# Altium PCB H bridge circuit - routed.PcbDoc
Units mm, origin at the board's own origin, x right, y up, seen from the top; angles counter-clockwise.
Board outline 46.04 x 31.11 mm, 2 copper layers (Top Layer, Bottom Layer); 34 components, 30 nets, 89 pads, 17 vias.
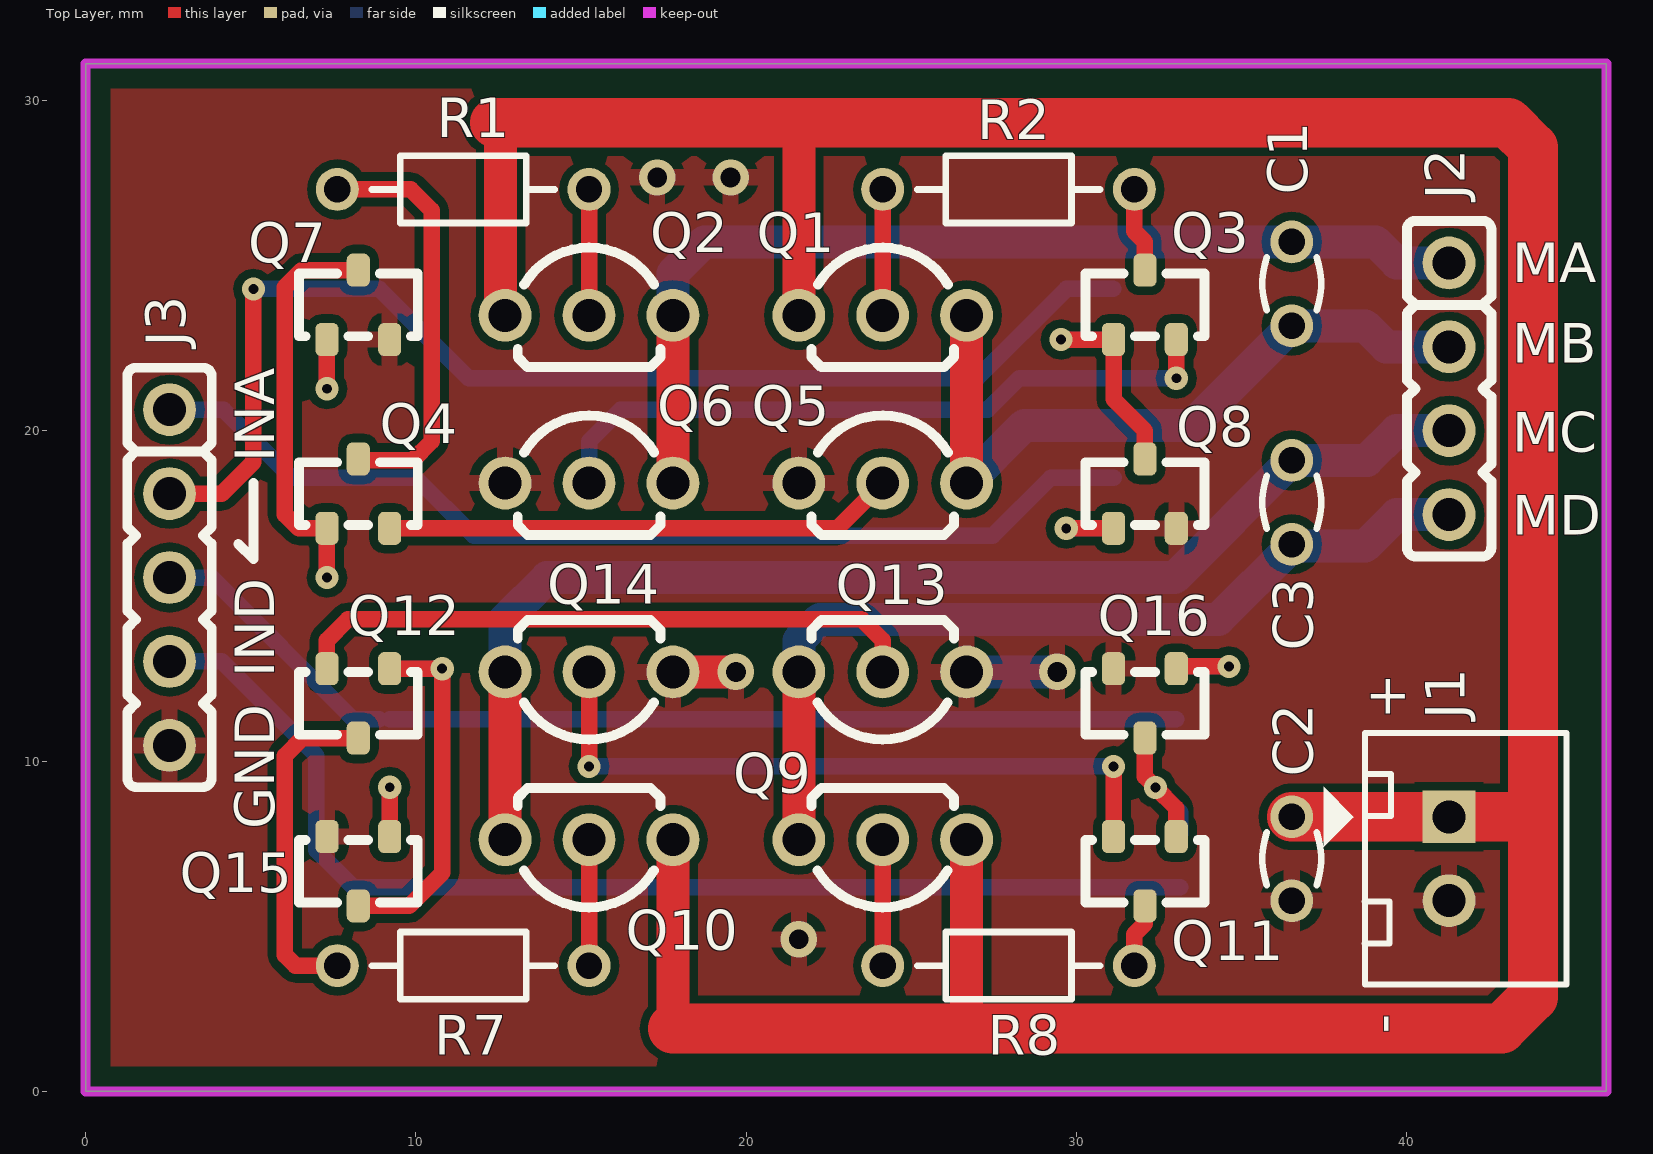
[diagram p0: Top Layer view]
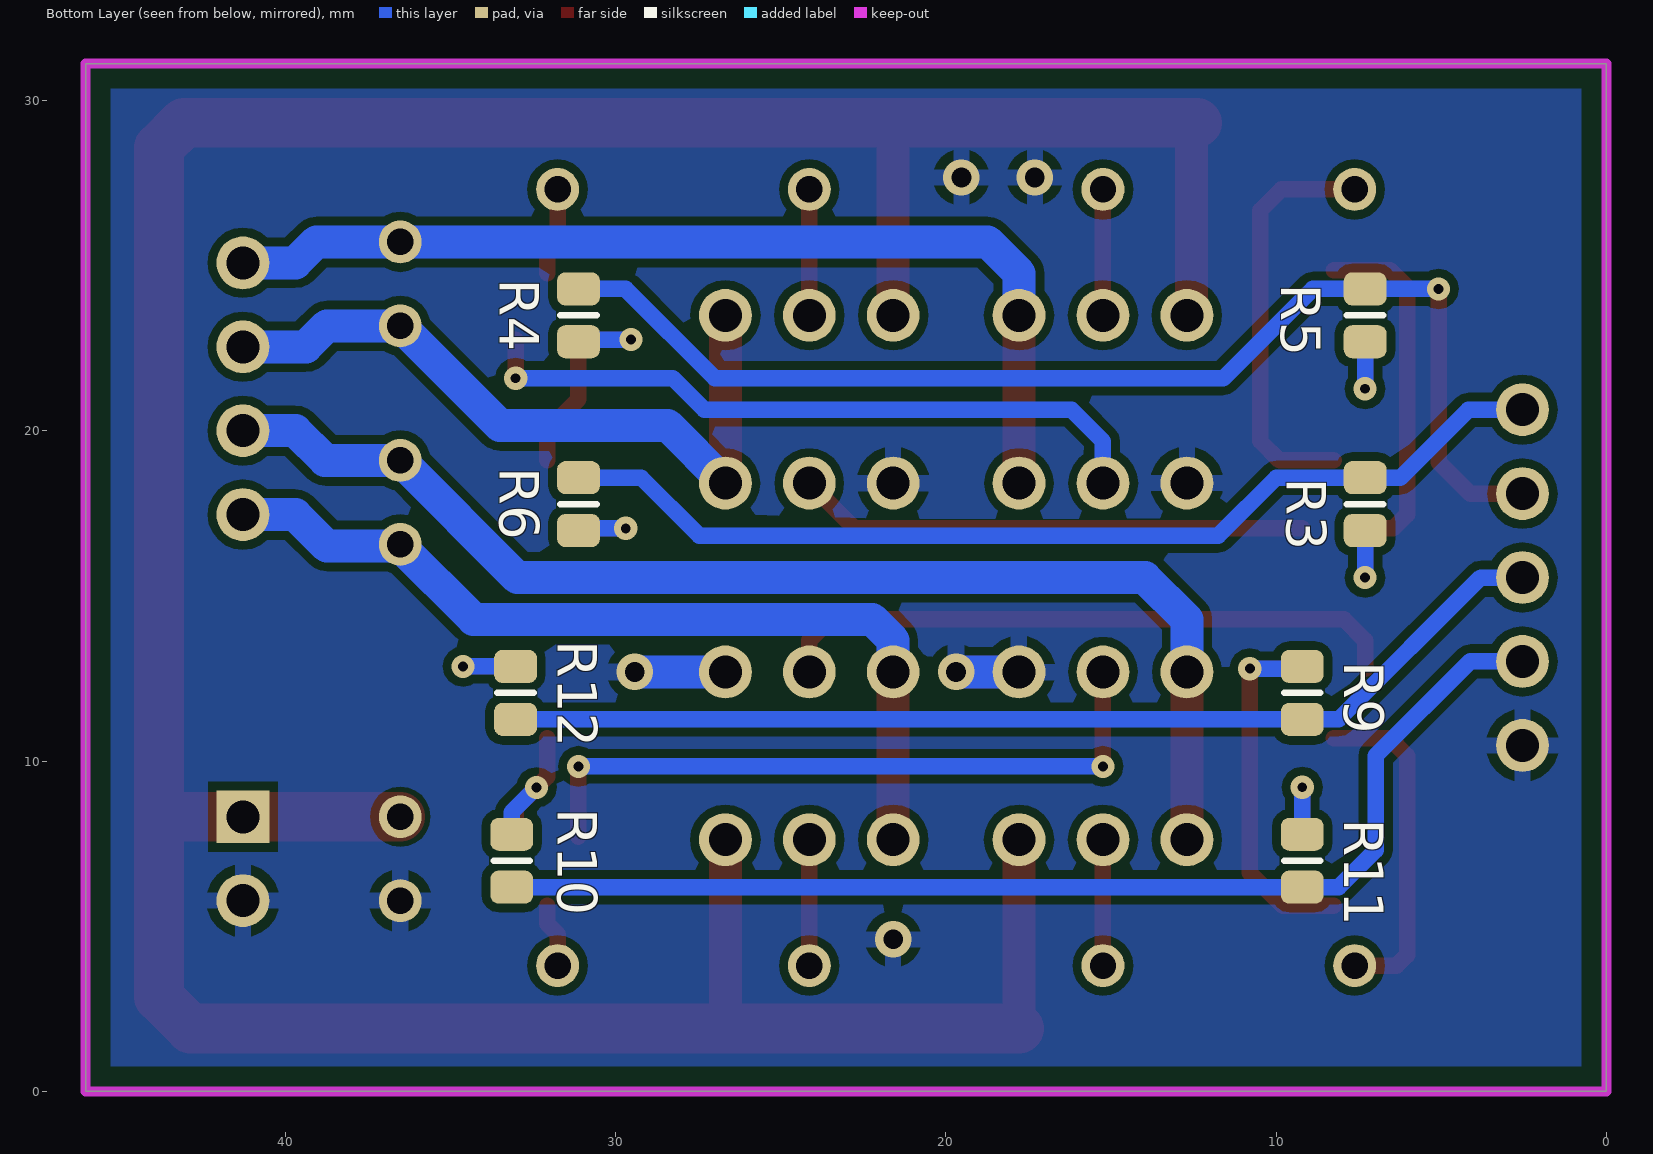
[diagram p1: Bottom Layer view, seen from below]
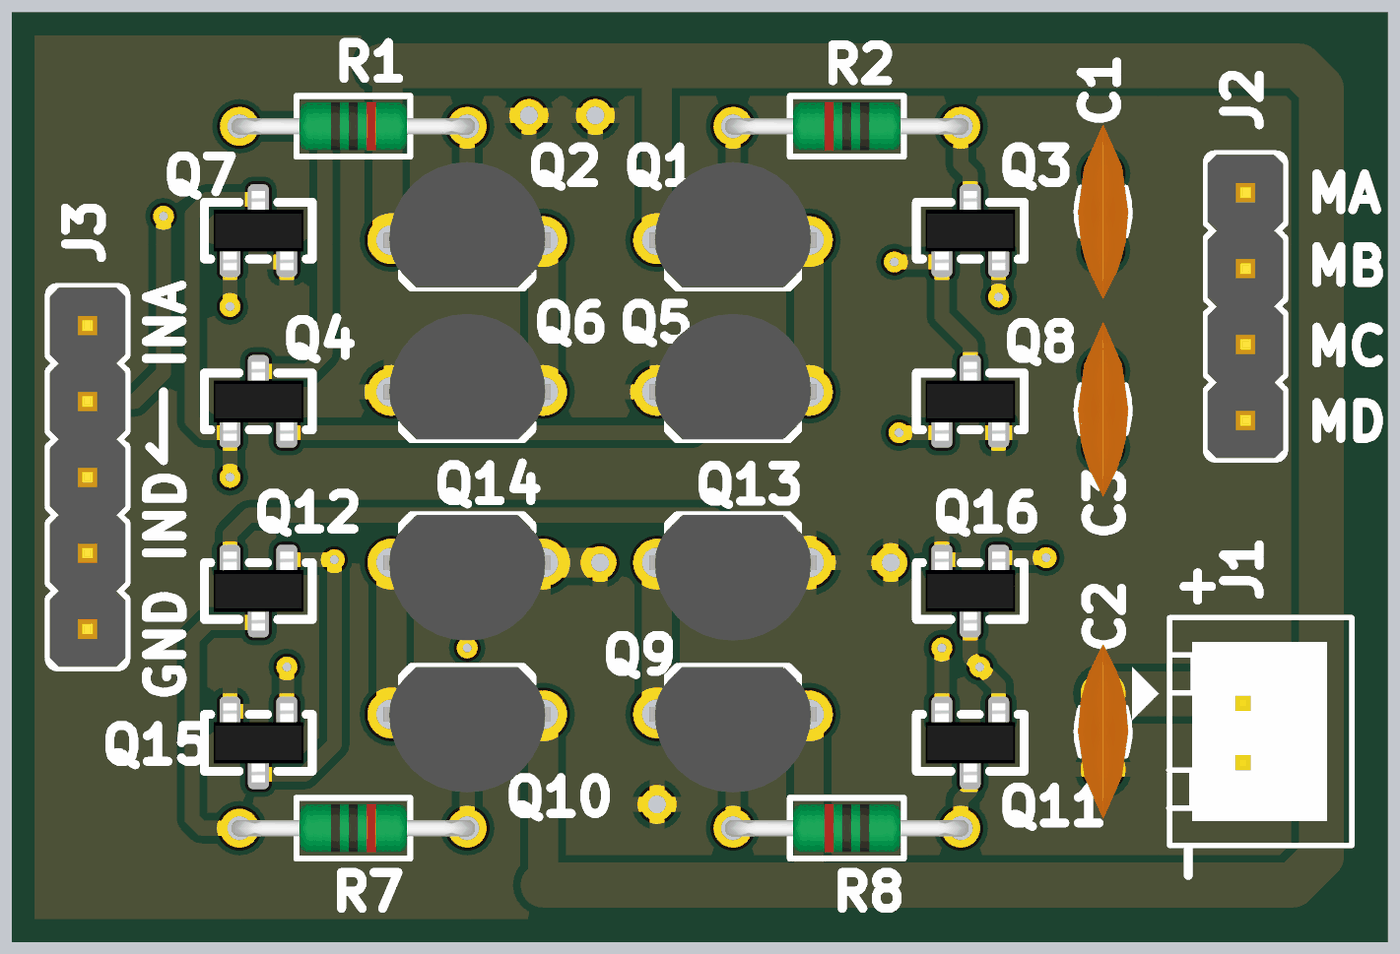
[diagram p2: 3D render of the assembled board from above, using the file's embedded part models]
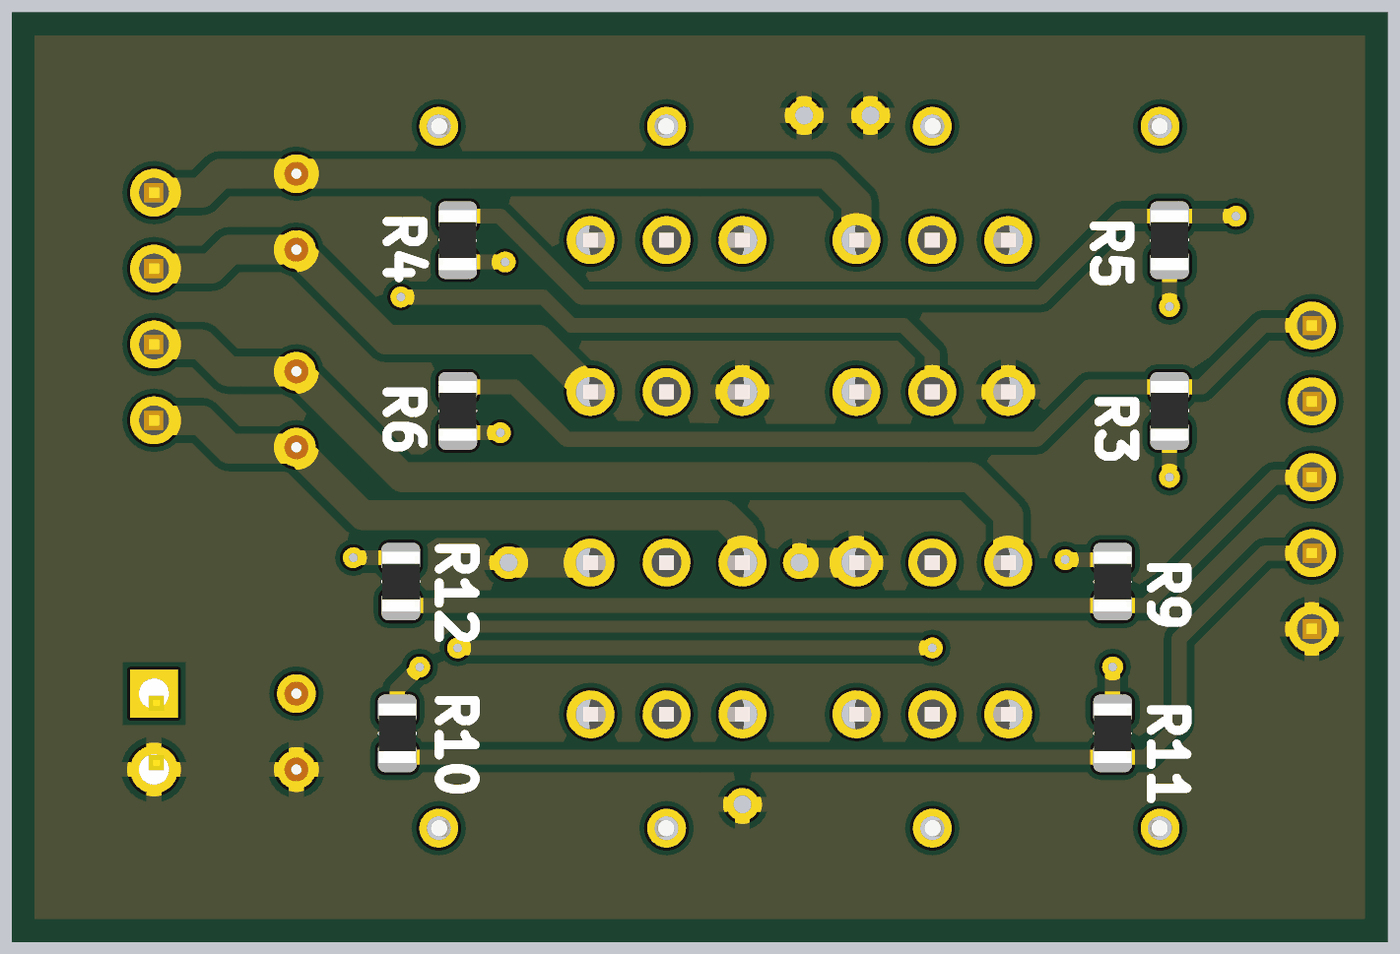
[diagram p3: 3D render of the assembled board from below, using the file's embedded part models]

## Layer stack, top to bottom
Top Solder: solder mask 0.0102, Solder Resist, Dk 3.5
Top Layer: signal copper 0.0356
Dielectric1: dielectric 0.32, FR-4, Dk 4.8
Bottom Layer: signal copper 0.0356
Bottom Solder: solder mask 0.0102, Solder Resist, Dk 3.5

## Board outline
0,0 46.038,0 46.038,31.115 0,31.115

## Design rules (kind name [scope] priority, off if disabled: settings)
Clearance [All] p1: gap=0.254 ignorepadtopadclearanceinfootprint=FALSE except(0: Arc-Hole Track-Hole SMDPad-Hole THPad-Hole Via-Hole Fill-Hole Poly-Hole Region-Hole Text-Hole)
PlaneConnect [All] p1: planeconnectstyle=Relief reliefexpansion=0.508 reliefentries=4 reliefconductorwidth=0.5 reliefairgap=0.254
PolygonConnect [All] p1: connectstyle=Relief reliefconductorwidth=0.5 reliefentries=4 polygonreliefangle="90 Angle" airgapwidth=0.3
RoutingVias [All] p1: holewidth=0.3 width=0.7 viastyle="Through Hole" minholewidth=0.3 minwidth=0.7 maxholewidth=0.6 maxwidth=1.1
SolderMaskExpansion [All] p1: expansion=0.102 istentingtop=FALSE
Width [All] p1: maxlimit=2 minlimit=0.5 preferedwidth=0.5
29 further rules are at their usual default settings.

## Components (designator, comment, footprint, x,y, rotation, side; value= is the part's Value field where it differs from the comment)
C1 "5WF104MABAA" C0_1uF 36.512,24.447 r270 top
C2 "5WF104MABAA" C0_1uF 36.512,7.045 r90 top
C3 "5WF104MABAA" C0_1uF 36.512,17.831 r270 top
J1 "OSTTC-02-2162" CON2 41.275,8.315 r270 top
J2 "2012-254-1x04-SG" Header_4 41.275,21.273 r270 top
J3 "2012-254-1x05-SG" Header_5 2.54,15.557 r270 top
Q1 "SS8550" SS8550 24.13,23.495 r0 top
Q2 "SS8550" SS8550 15.24,23.495 r0 top
Q3 "2SC1815-HF" 2SC1815-HF 32.067,23.812 r0 top
Q4 "2SC1815-HF" 2SC1815-HF 8.255,18.098 r0 top
Q5 "SS8050" SS8050 24.13,18.415 r0 top
Q6 "SS8050" SS8050 15.24,18.415 r0 top
Q7 "2SC1815-HF" 2SC1815-HF 8.255,23.812 r0 top
Q8 "2SC1815-HF" 2SC1815-HF 32.067,18.098 r0 top
Q9 "SS8550" SS8550 24.13,7.62 r180 top
Q10 "SS8550" SS8550 15.24,7.62 r180 top
Q11 "2SC1815-HF" 2SC1815-HF 32.067,6.667 r180 top
Q12 "2SC1815-HF" 2SC1815-HF 8.255,11.747 r180 top
Q13 "SS8050" SS8050 24.13,12.7 r180 top
Q14 "SS8050" SS8050 15.24,12.7 r180 top
Q15 "2SC1815-HF" 2SC1815-HF 8.255,6.667 r180 top
Q16 "2SC1815-HF" 2SC1815-HF 32.067,11.747 r180 top
R1 "CF1/4W220RJ25" "Res AXIAL-0.3" 11.43,27.305 r0 top
R2 "CF1/4W220RJ25" "Res AXIAL-0.3" 27.94,27.305 r180 top
R3 "CR05JL7-2K2" RESC2012L 7.302,17.78 r270 bottom
R4 "CR05JL7-2K2" RESC2012L 31.117,23.495 r90 bottom
R5 "CR05JL7-2K2" RESC2012L 7.302,23.495 r270 bottom
R6 "CR05JL7-2K2" RESC2012L 31.115,17.78 r90 bottom
R7 "CF1/4W220RJ25" "Res AXIAL-0.3" 11.43,3.81 r0 top
R8 "CF1/4W220RJ25" "Res AXIAL-0.3" 27.94,3.81 r180 top
R9 "CR05JL7-2K2" RESC2012L 9.207,12.065 r90 bottom
R10 "CR05JL7-2K2" RESC2012L 33.138,6.985 r270 bottom
R11 "CR05JL7-2K2" RESC2012L 9.207,6.985 r90 bottom
R12 "CR05JL7-2K2" RESC2012L 33.02,12.065 r270 bottom

## Footprints (in the part's own frame and the unit in brackets; to place one, negate y for a bottom-side part, rotate by r counter-clockwise, add the part's x,y. Pads: shape width x height; smd on the part's side, far side on the other; paste and mask are expansions set on the pad)
2SC1815-HF [mm] "SOT23-3"
  rrect50% 0.7x1 smd: 1(-0.95,-1.05) 2(0.95,-1.05) 3(0,1.05)
  silkscreen extent -1.8,-0.95 1.8,0.95, body extent -1.5,-1.32 1.5,1.32, height 1.08
C0_1uF [mm] "Tu gom 3.5wf104mabaa 05 x 1.78 x 3.43 mm (WxTxH max); Pin Spacing 2.54 mm (typ)"
  round 1.3 hole 0.8: 1(-1.27,0) 2(1.27,0)
  silkscreen extent -0.8,-0.89 0.8,0.89, body extent -2.92,-0.85 2.92,0.85, height 6.42
CON2 [mm] "CON2"
  rect 1.6x1.6 hole 1 mask+0.1: 1(0,0)
  round 1.6 hole 1 mask+0.1: 2(2.54,0)
  silkscreen extent -2.54,-3.8 5.08,3.56, body extent -1.73,-1.78 4.27,2.72, height 6
Header_4 [mm] "Connector DIP, 4Pin_2.54mm"
  round 1.6 hole 1 mask+0.1: 1(-3.81,0) 2(-1.27,0) 3(1.27,0) 4(3.81,0)
  silkscreen extent -5.08,-1.28 5.08,1.28, body extent -5.08,-1.27 5.08,1.27, height 10.1
Header_5 [mm] "Connector DIP, 5Pin_2.54mm"
  round 1.6 hole 1 mask+0.1: 1(-5.08,0) 2(-2.54,0) 3(0,0) 4(2.54,0) 5(5.08,0)
  silkscreen extent -6.35,-1.28 6.35,1.28, body extent -6.35,-1.27 6.35,1.27, height 10.1
"Res AXIAL-0.3" [mm] "Axial Device, Thru-Hole; 2 Leads; 0.3 in Pin Spacing"
  round 1.3 hole 0.8: 1(-3.81,0) 2(3.81,0)
  silkscreen extent -2.77,-1.02 2.77,1.02, body extent -4.07,-0.8 4.08,0.8, height 1.6
RESC2012L [mm] "Chip Resistor, Body 2.0x1.3mm, IPC High Density"
  rrect50% 1x1.3 smd: 1(-0.8,0) 2(0.8,0)
  silkscreen extent 0,-0.55 0,0.55, body extent -1,-0.63 1,0.63, height 0.6
SS8050 [mm] "TO-92 Bent Lead, Flat Index; 3 In-Line, Axial Leads; Body Dia. 4.5mm; Leads 0.51 x 0.48 mm (max)"
  round 1.6 hole 1 mask+0.1: 1(-2.54,0) 2(0,0) 3(2.54,0)
  silkscreen extent -2.16,-1.57 2.16,2.05, body extent -2.79,-1.59 2.79,2.61, height 10
SS8550 [mm] "TO-92 Bent Lead, Flat Index; 3 In-Line, Axial Leads; Body Dia. 4.5mm; Leads 0.51 x 0.48 mm (max)"
  round 1.6 hole 1 mask+0.1: 1(-2.54,0) 2(0,0) 3(2.54,0)
  silkscreen extent -2.16,-1.57 2.16,2.05, body extent -2.79,-1.59 2.79,2.61, height 10

## Part data
C1 C2 C3: "CAP Y5P CAPNTO 0.1uF 25V 20%"
J1: "Terminal Block 2 Poles 5.08mm Blue"
J2: "Male Header 04 Pin 2.54mm Straight"
J3: "Male Header 05 Pin 2.54mm Straight"
Q1 Q2 Q9 Q10: "Trans PNP -25V -1.5A TO-92"
Q3 Q4 Q7 Q8 Q11 Q12 Q15 Q16: "Trans NPN 50V 150mA SOT-23"
Q5 Q6 Q13 Q14: "Trans NPN 25V 1.5A TO-92"
R1 R2 R7 R8: "RES CF AXIAL-0.3 5% 1/4W 220R"
R3 R4 R5 R6 R9 R10 R11 R12: "RES CR 0805 5% 1/8W 2K2"

## Via types
v1: diameter 0.7, hole 0.3, Top Layer to Bottom Layer, 12 vias
v2: diameter 1.1, hole 0.6, Top Layer to Bottom Layer, 5 vias

## Nets (pads, with @x,y where several pads share a name; then routed paths per layer and width w, separated by ;. In a path a pad name is that pad's centre, name@x,y a point inside that pad or via, vN(x,y) a via of type N, cw(c..) or ccw(c..) an arc to the next point about the centre after c; other vN are vias at no path point)
GND: C2.1 J1.2 J3.5 Q5.1 Q6.1 Q7.2 Q8.2 Q13.1 Q14.1 Q15.2 Q16.2 | length 6.4
  Top Layer w1: Q14.1 v2@19.614,12.7
  Bottom Layer w1: Q14.1 v2@19.587,12.7 ; Q13.1 v2(29.412,12.7)
  other v2: 21.59,4.606 19.685,12.7 17.304,27.668 19.526,27.668
IN_A: J3.1 R3.1 R6.2 | length 30.9
  Bottom Layer w0.5: J3.1 4.179,20.637 6.237,18.58 R3.1 9.995,18.58 11.747,16.828 27.464,16.828 29.216,18.58 R6.2 R6.2@31.117,18.58
IN_B: J3.2 R4.2 R5.1 | length 36.5
  Top Layer w0.5: J3.2 4.127,18.098 5.08,19.05 v1(5.08,24.295)
  Bottom Layer w0.5: v1(5.08,24.295) R5.1 8.89,24.295 11.595,21.59 26.987,21.59 29.693,24.295 R4.2@31.115,24.295
IN_C: J3.3 R9.1 R12.2 | length 31.9
  Bottom Layer w0.5: J3.3 3.81,15.557 8.102,11.265 R9.1@8.89,11.265 ; R9.1 R12.2
IN_D: J3.4 R10.2 R11.1 | length 35.1
  Bottom Layer w0.5: J3.4 4.127,13.018 6.985,10.16 6.985,7.302 8.103,6.185 R11.1 R10.2
M_A: C1.1 J2.1 Q2.3 Q6.3 | length 30.5
  Top Layer w1: Q6.3 Q2.3
  Bottom Layer w1: Q2.3 17.78,24.765 18.732,25.717 39.052,25.717 39.688,25.082 J2.1
M_B: C1.2 J2.2 Q1.3 Q5.3 | length 21.9
  Top Layer w1: Q5.3 Q1.3
  Bottom Layer w1: Q5.3 28.416,20.161 33.496,20.161 C1.2 38.735,23.177 39.37,22.543 J2.2
M_C: C3.1 J2.3 Q10.3 Q14.3 | length 37.6
  Top Layer w1: Q10.3 Q14.3
  Bottom Layer w1: Q14.3 12.7,14.287 13.97,15.557 32.969,15.557 C3.1 38.786,19.101 39.688,20.002 J2.3
M_D: C3.2 J2.4 Q9.3 Q13.3 | length 27.3
  Top Layer w1: Q9.3 Q13.3
  Bottom Layer w1: Q13.3 21.59,13.652 22.225,14.287 34.29,14.287 36.512,16.51 38.735,16.51 39.688,17.462 J2.4
NetQ1_2: Q1.2 R2.2 | length 3.8
  Top Layer w0.5: Q1.2 R2.2
NetQ2_2: Q2.2 R1.2 | length 3.8
  Top Layer w0.5: Q2.2 R1.2
NetQ3_1: Q3.1 Q8.3 R4.1 | length 7.2
  Top Layer w0.5: v1@29.625,22.762 Q3.1 31.118,20.955 ; 31.118,20.952 32.067,20.002 Q8.3@32.067,19.101
  Bottom Layer w0.5: v1(29.527,22.762) 31.048,22.762 R4.1@31.115,22.695
NetQ3_3: Q3.3 R2.1 | length 2.7
  Top Layer w0.5: R2.1 31.75,26.035 32.067,25.717 Q3.3@32.067,24.765
NetQ4_1: Q4.1 Q7.3 R3.2 | length 13.7
  Top Layer w0.5: v1@7.305,15.56 Q4.1 6.448,17.047 6.032,17.462 6.032,24.35 6.545,24.863 Q7.3
  Bottom Layer w0.5: v1(7.305,15.557) R3.2@7.305,16.977
NetQ4_3: Q4.3 R1.1 | length 12.6
  Top Layer w0.5: R1.1 9.842,27.305 10.477,26.67 10.477,19.685 9.894,19.101 Q4.3@8.255,19.101
NetQ7_1: Q7.1 R5.2 | length 2.9
  Top Layer w0.5: v1@7.305,21.275 Q7.1
  Bottom Layer w0.5: v1@7.302,21.275 R5.2
  other v1: 7.305,21.273
NetQ8_1: Q8.1 R6.1 | length 2.8
  Top Layer w0.5: v1@29.747,17.047 Q8.1
  Bottom Layer w0.5: v1(29.686,17.047) 31.045,17.047 R6.1@31.115,16.977
NetQ9_2: Q9.2 R8.2 | length 3.9
  Top Layer w0.5: R8.2 Q9.2 ; Q9.2@24.447,7.62 Q9.2@24.447,7.718
NetQ10_2: Q10.2 R7.2 | length 3.8
  Top Layer w0.5: R7.2 Q10.2
NetQ11_1: Q11.1 Q16.3 R10.1 | length 5.1
  Top Layer w0.5: Q16.3 32.067,9.525 v1(32.388,9.205) 33.017,8.575 Q11.1
  Bottom Layer w0.5: v1@32.388,9.207 33.138,8.457 R10.1
NetQ11_3: Q11.3 R8.1 | length 1.9
  Top Layer w0.5: R8.1 31.75,4.763 32.067,5.08 Q11.3
NetQ12_1: Q12.1 Q15.3 R9.2 | length 12.2
  Top Layer w0.5: Q15.3 9.796,5.617 10.795,6.616 v1(10.795,12.798) Q12.1
  Bottom Layer w0.5: R9.2@9.305,12.798 v1(10.795,12.798)
NetQ12_3: Q12.3 R7.1 | length 10.2
  Top Layer w0.5: R7.1 6.35,3.81 6.032,4.127 6.032,10.16 6.57,10.697 Q12.3
NetQ15_1: Q15.1 R11.2 | length 2.9
  Top Layer w0.5: Q15.1 v1@9.205,9.205
  Bottom Layer w0.5: R11.2 v1(9.207,9.207)
NetQ16_1: Q16.1 R12.1 | length 3
  Top Layer w0.5: Q16.1@33.02,12.798 33.088,12.865 v1(34.608,12.865)
  Bottom Layer w0.5: R12.1 v1@34.443,12.865
TA: Q4.2 Q5.2 | length 15.5
  Top Layer w0.5: Q4.2@9.207,17.047 22.762,17.047 Q5.2
TB: Q3.2 Q6.2 | length 21
  Top Layer w0.5: v1(33.018,21.59) Q3.2
  Bottom Layer w0.5: Q6.2 15.24,19.685 16.192,20.637 27.305,20.637 28.258,21.59 v1(33.018,21.59)
TC: Q12.2 Q13.2 | length 19.2
  Top Layer w0.5: Q12.2 7.305,13.655 7.938,14.287 23.495,14.287 24.13,13.652 Q13.2
TD: Q11.2 Q14.2 | length 20.9
  Top Layer w0.5: v1(15.24,9.842) Q14.2 ; Q11.2 v1(31.117,9.842)
  Bottom Layer w0.5: v1(15.24,9.842) v1(31.117,9.842)
VCC: C2.2 J1.1 Q1.1 Q2.1 Q9.1 Q10.1 | length 114
  Top Layer w1: 12.566,29.027 12.566,23.629 Q2.1 ; 17.78,1.905 Q10.1 ; Q1.1 21.59,29.326 ; 26.67,1.905 Q9.1
  Top Layer w1.5: 12.383,29.326 21.59,29.326 43.064,29.326 43.815,28.575 43.815,8.315 ; 17.78,1.905 26.67,1.905 42.862,1.905 43.815,2.857 43.815,8.315 ; C2.2 J1.1 43.815,8.315

## Polygon pours and split planes (outlines as drawn)
GND on Top Layer "Top Overlay-No Net" (solid, remove dead copper, pour order 4): 0,30.956 46.038,30.956 46.038,0.159 0,0.159 -0.159,0.318 -0.159,30.956
GND on Bottom Layer "Top Overlay-No Net" (solid, remove dead copper, pour order 6): 0,31.115 46.038,31.115 46.038,0.159 0,0.159 0,31.115

## Keep-outs
Keep-Out Layer:
  the board outline again, w0.3

## Silkscreen, mask and mechanical layers (free items; w line width, h text height)
Top Overlay:
  lines w0.3: 4.621,16.573 5.08,16.115 5.08,16.192 5.08,18.415
  text "MA" at 43.18,24.5 h1.2
  text "MB" at 43.18,22.066 h1.2
  text "MC" at 43.18,19.367 h1.2
  text "INA" at 5.715,19.05 h1.2 r90
  text "MD" at 43.18,16.845 h1.2
  text "IND" at 5.715,12.541 h1.2 r90
  text "+" at 38.735,11.43 h1.2
  text "GND" at 5.715,7.938 h1.2 r90
  text "-" at 39.835,1.746 h1.2 r90

## Text inside footprints (layer, text, board x,y; h text height)
J2: Mechanical 1 "1" at 41.021,25.336 h1.2 r270; Mechanical 1 "4" at 41.021,17.716 h1.2 r270
J3: Mechanical 1 "5" at 2.286,10.731 h1.2 r270; Mechanical 1 "1" at 2.286,20.892 h1.2 r270
Q1: Mechanical 1 "E" at 21.336,23.114 h0.8; Mechanical 1 "B" at 23.876,23.114 h0.8; Mechanical 1 "C" at 26.416,23.114 h0.8
Q2: Mechanical 1 "E" at 12.446,23.114 h0.8; Mechanical 1 "B" at 14.986,23.114 h0.8; Mechanical 1 "C" at 17.526,23.114 h0.8
Q3: Mechanical 1 "E" at 32.828,22.958 h1; Mechanical 1 "C" at 31.782,24.002 h1; Mechanical 1 "B" at 30.927,22.958 h1
Q4: Mechanical 1 "E" at 9.015,17.243 h1; Mechanical 1 "C" at 7.97,18.287 h1; Mechanical 1 "B" at 7.115,17.243 h1
Q5: Mechanical 1 "C" at 26.416,18.034 h0.8; Mechanical 1 "B" at 23.876,18.034 h0.8; Mechanical 1 "E" at 21.336,18.034 h0.8
Q6: Mechanical 1 "C" at 17.526,18.034 h0.8; Mechanical 1 "B" at 14.986,18.034 h0.8; Mechanical 1 "E" at 12.446,18.034 h0.8
Q7: Mechanical 1 "E" at 9.015,22.958 h1; Mechanical 1 "C" at 7.97,24.002 h1; Mechanical 1 "B" at 7.115,22.958 h1
Q8: Mechanical 1 "E" at 32.828,17.243 h1; Mechanical 1 "C" at 31.782,18.287 h1; Mechanical 1 "B" at 30.927,17.243 h1
Q9: Mechanical 1 "E" at 26.924,8.001 h0.8 r180; Mechanical 1 "B" at 24.384,8.001 h0.8 r180; Mechanical 1 "C" at 21.844,8.001 h0.8 r180
Q10: Mechanical 1 "E" at 18.034,8.001 h0.8 r180; Mechanical 1 "B" at 15.494,8.001 h0.8 r180; Mechanical 1 "C" at 12.954,8.001 h0.8 r180
Q11: Mechanical 1 "E" at 31.307,7.522 h1 r180; Mechanical 1 "C" at 32.353,6.478 h1 r180; Mechanical 1 "B" at 33.208,7.522 h1 r180
Q12: Mechanical 1 "E" at 7.495,12.602 h1 r180; Mechanical 1 "C" at 8.54,11.558 h1 r180; Mechanical 1 "B" at 9.395,12.602 h1 r180
Q13: Mechanical 1 "C" at 21.844,13.081 h0.8 r180; Mechanical 1 "B" at 24.384,13.081 h0.8 r180; Mechanical 1 "E" at 26.924,13.081 h0.8 r180
Q14: Mechanical 1 "C" at 12.954,13.081 h0.8 r180; Mechanical 1 "B" at 15.494,13.081 h0.8 r180; Mechanical 1 "E" at 18.034,13.081 h0.8 r180
Q15: Mechanical 1 "E" at 7.495,7.522 h1 r180; Mechanical 1 "C" at 8.54,6.477 h1 r180; Mechanical 1 "B" at 9.395,7.522 h1 r180
Q16: Mechanical 1 "E" at 31.307,12.602 h1 r180; Mechanical 1 "C" at 32.353,11.558 h1 r180; Mechanical 1 "B" at 33.208,12.602 h1 r180